# EAGLE board Top Panel V5 - Notched (EAGLE 7.3.0)
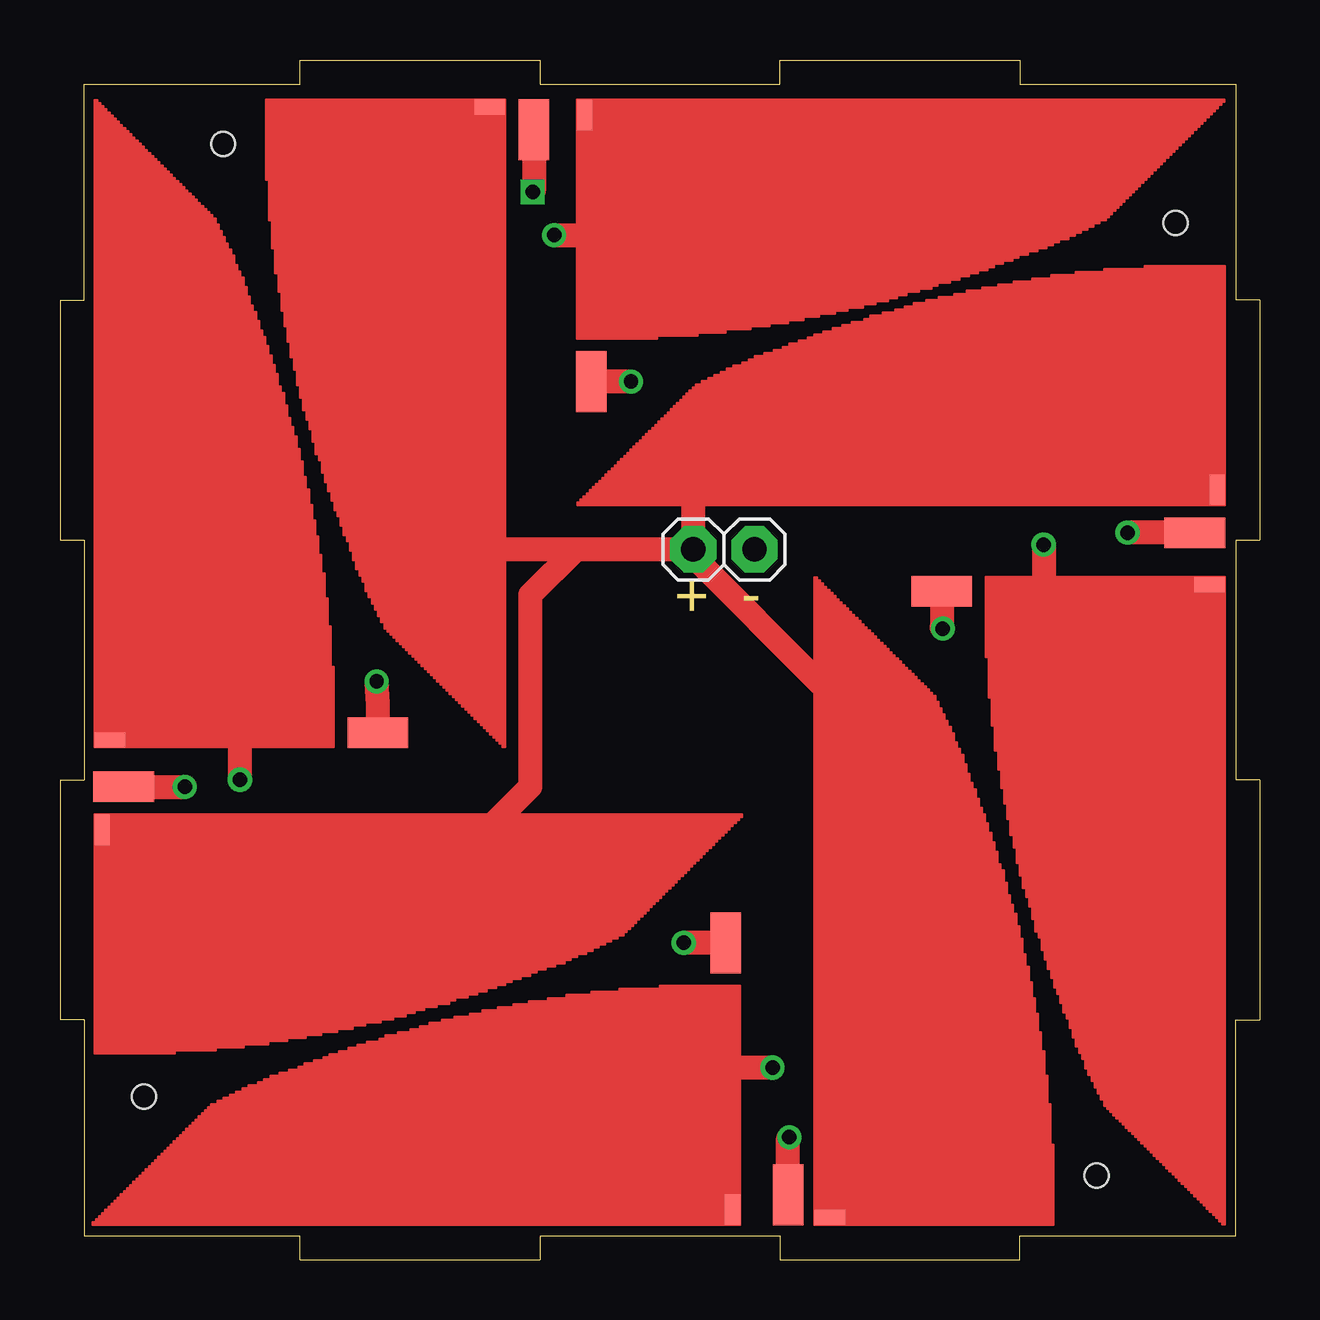
[diagram p0: board, top side]
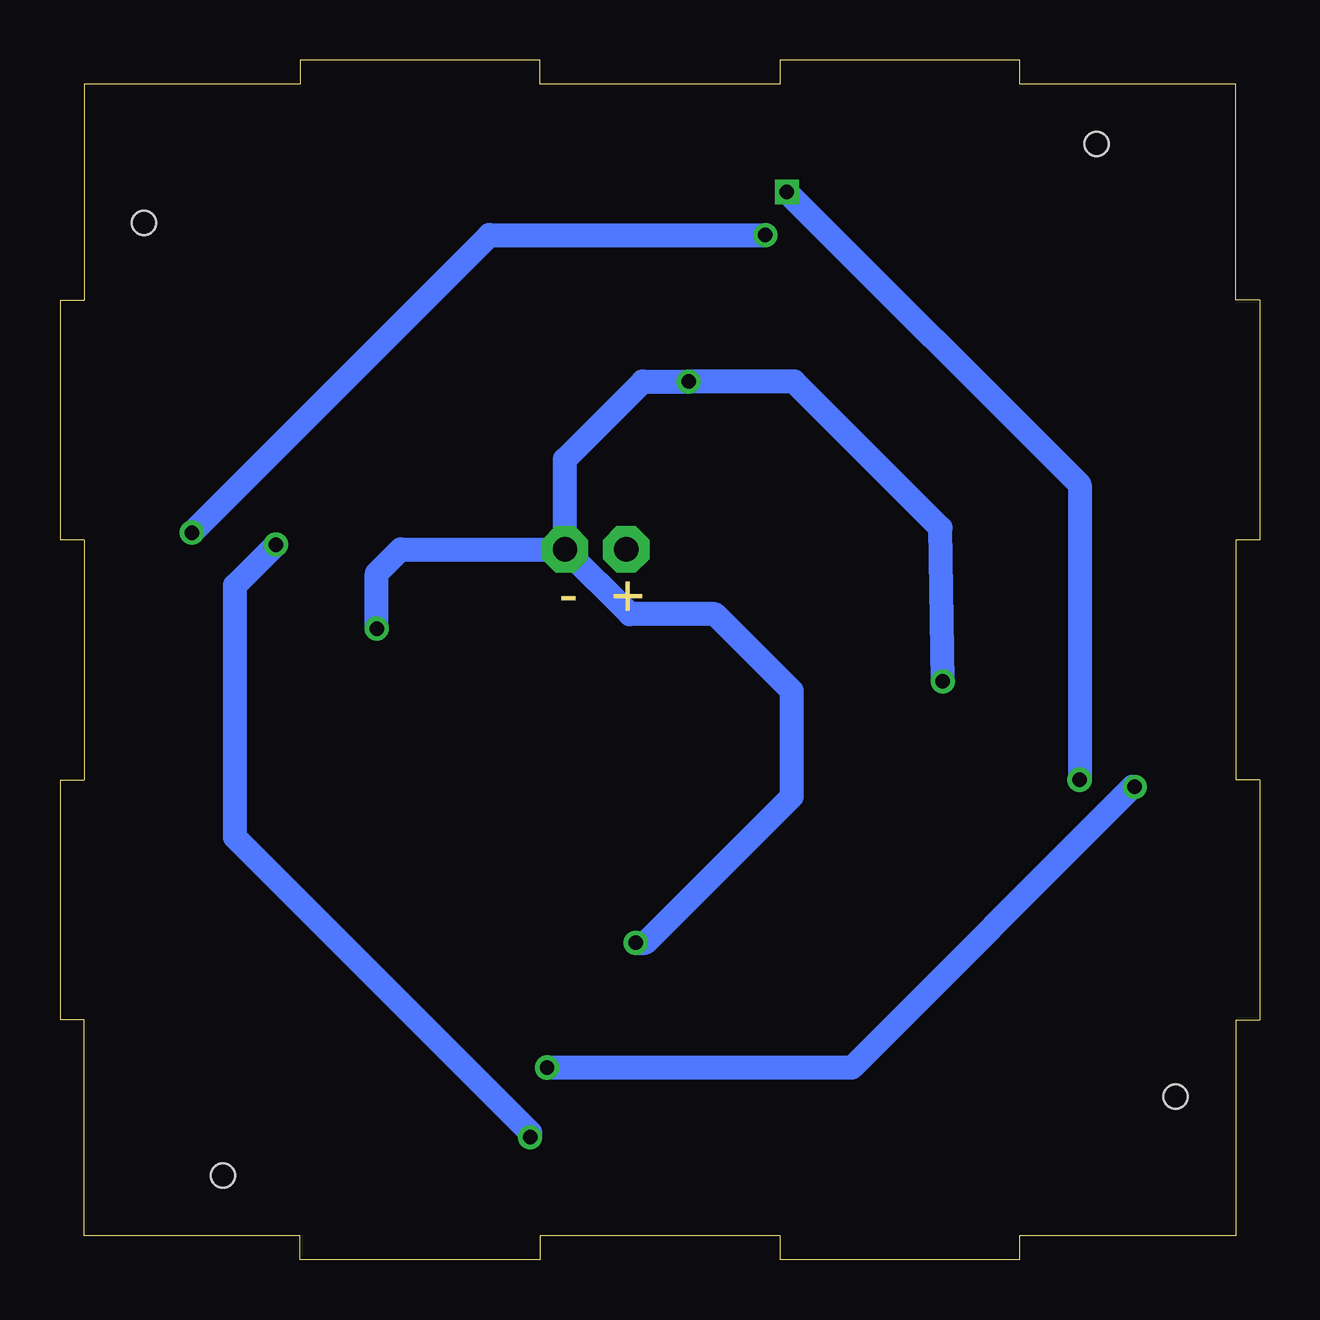
[diagram p1: board, bottom side, seen from below]

Size 50 x 50 mm. Coordinates in mm from the lower left corner, seen from the top.
Outline: 49,10 50,10 50,20 49,20 49,30 50,30 50,40 49,40 49,49 40,49 40,50 30,50 30,49 20,49 20,50 10,50 10,49 1,49 1,40 0,40 0,30 1,30 1,20 0,20 0,10 1,10 1,1 10,1 10,0 20,0 20,1 30,1 30,0 40,0 40,1 49,1 49,10
Copper layers (1*16): Top 0.035mm / dielectric 1.5mm / Bottom 0.035mm
Design rules "default": minimum track width 10mil, minimum drill 24mil, track to track 8mil, track to pad 8mil, pad to pad 8mil, via to via 8mil, smd to smd 8mil, copper to edge 40mil, drill to drill 8mil, minimum pad ring 10mil, minimum via ring 8mil, stop-mask expansion 4mil, vias tented up to drill 0mil, thermal gap 10mil
Holes 1 mm at 3.5,6.8 43.2,3.5 46.5,43.2 6.8,46.5

## Footprints (pad centres in the part's own frame; a part is rotated, then mirrored left to right if it is on the bottom)
TRISOLX = smd 1.27 x 0.635: P$1 0.584,0.26
SMD1,27-2,54 = smd 1.27 x 2.54: 1 0,0
1X01 = drill 1.016 pad 1.93 octagon: 1 0,0

## Placement (x,y rotation side)
E$1  [TRISOLX]  18.5,48.3 180 top
E$2  [TRISOLX]  1.5,18.5 270 top
E$3  [TRISOLX]  28.3,1.5 90 top
E$4  [TRISOLX]  48.5,28.4 180 top
E$5  [TRISOLX]  31.5,1.5 0 top
E$6  [TRISOLX]  21.6,48.3 270 top
E$7  [TRISOLX]  48.5,31.5 90 top
E$8  [SMD1,27-2,54]  27.75,13.2 180 top
E$9  [SMD1,27-2,54]  13.25,21.95 90 top
E$10  [SMD1,27-2,54]  47.3,30.3 90 top
E$11  [SMD1,27-2,54]  22.15,36.6 180 top
E$12  [SMD1,27-2,54]  2.65,19.7 90 top
E$13  [SMD1,27-2,54]  36.75,27.85 90 top
E$14  [SMD1,27-2,54]  19.75,47.1 180 top
E$15  [SMD1,27-2,54]  30.35,2.7 180 top
E$16  [1X01]  26.4,29.6 0 top
E$17  [1X01]  28.95,29.6 0 top
E$19  [TRISOLX]  1.5,21.4 0 top

## Library data of the parts
E$1-E$7 E$19 = trisolx
E$8-E$15 = wirepad
E$16 E$17 = adafruit

## Nets
S$1: E$8.1 E$9.1 E$11.1 E$13.1 E$17.1
S$2: E$3.P$1 E$12.1
S$3: E$10.1
S$4: E$1.P$1 E$2.P$1 E$5.P$1 E$7.P$1 E$16.1
S$6: E$14.1 E$19.P$1
S$10: E$4.P$1 E$15.1

## Tracks (layer width: path | path; a pad name or v marks a point on that pad's centre or on a via)
S$1  (via drill 0.6)
  Top 0.254: 36.75,26.35 v36.8,26.3
  Top 1: E$9.1 13.25,23.15 v13.2,24.1 | v23.8,36.6 E$11.1 | E$13.1 36.75,26.35 | E$8.1 v26,13.2
  Bottom 1: v13.2,24.1 13.3,30.5 19.4,36.6 v23.8,36.6 25.7,36.6 28.95,33.35 E$17.1 | v36.8,26.3 36.8,28.6 35.8,29.6 E$17.1 | v26,13.2 25.6,13.2 19.5,19.3 19.5,23.7 22.7,26.9 26.25,26.9 E$17.1
S$2  (via drill 0.6)
  Top 0.406: 27.2,3.3 27.2,2.92 E$3.P$1
  Top 1: E$12.1 v5.2,19.7 | v29.7,8 27.5,8 27.4,7.9 27.4,3.5 27.2,3.3
  Bottom 1: v5.2,19.7 5.3,19.7 17,8 v29.7,8
S$3  (via drill 0.6)
  Top 0.254: 22.3,42.7 22.3,47.27
  Top 1: E$10.1 v44.5,30.3 | v20.6,42.7 22.3,42.7
  Bottom 1: v44.5,30.3 32.1,42.7 v20.6,42.7
S$4
  Top 0.254: 17.9,29.6 17.8,29.7 17.8,47.92 E$1.P$1 | 23.7,31.7 23.8,31.8 26.4,31.8 30.3,31.8 30.7,32.2 34.1,32.2 36,34.1 E$7.P$1 | 31.7,19.1 32.08,18.72 32.08,17.9 | E$5.P$1 32.08,7 | 32.08,7 32.08,17.9 | 31.7,16.7 32.7,15.7 32.7,3.4 33.4,2.7 33.4,9.4 33.2,9.6 33.2,8.12 32.08,7 | 17.9,29.6 17.1,29.6 16.9,29.8 16.9,46.4 17.1,46.6 17.1,29 17.9,28.2 17.9,29.6 | E$16.1 26.4,29.3 | 31.7,24 31.7,18.28 32.08,17.9
  Top 0.305: 3.8,17.4 2.27,17.4 E$2.P$1
  Top 1: E$16.1 26.4,31.8 | E$16.1 17.9,29.6 | 26.4,29.3 31.7,24 | E$16.1 21.5,29.6 19.6,27.7 19.6,19.7 17.6,17.7 4.1,17.7 3.8,17.4
S$6  (via drill 0.6)
  Top 0.254: 6,21.5 6.1,21.6 2.14,21.6 E$19.P$1
  Top 0.305: 7.3,23 7.3,22.8 6.1,21.6
  Top 1: E$14.1 19.75,44.55 v19.7,44.5 | v7.5,20 7.5,22.8 7.3,23
  Bottom 1: v19.7,44.5 7.5,32.3 v7.5,20
S$10  (via drill 0.6)
  Top 0.254: 30.35,5.05 v30.4,5.1 | 45.4,27.4 45.3,27.3 47.08,27.3 E$4.P$1
  Top 1: E$15.1 30.35,5.05 | v41,29.8 41,28.3 41.2,28.1 | 41.2,28.1 42.4,26.9 | 45.3,27.3 42.2,27.3 41.2,26.3 41.2,28.1
  Bottom 1: v30.4,5.1 30.4,5.3 42.7,17.6 42.7,28.1 v41,29.8

## Text on the board
Dimension: + | -